# Altium PCB Battery Pack BP8.PcbDoc
Units mm, origin at the board's own origin, x right, y up, seen from the top; angles counter-clockwise.
Board outline 55 x 45 mm, 2 copper layers (Top Layer, Bottom Layer), stack 1.57 mm thick; 25 components, 12 nets, 64 pads, 10 vias.
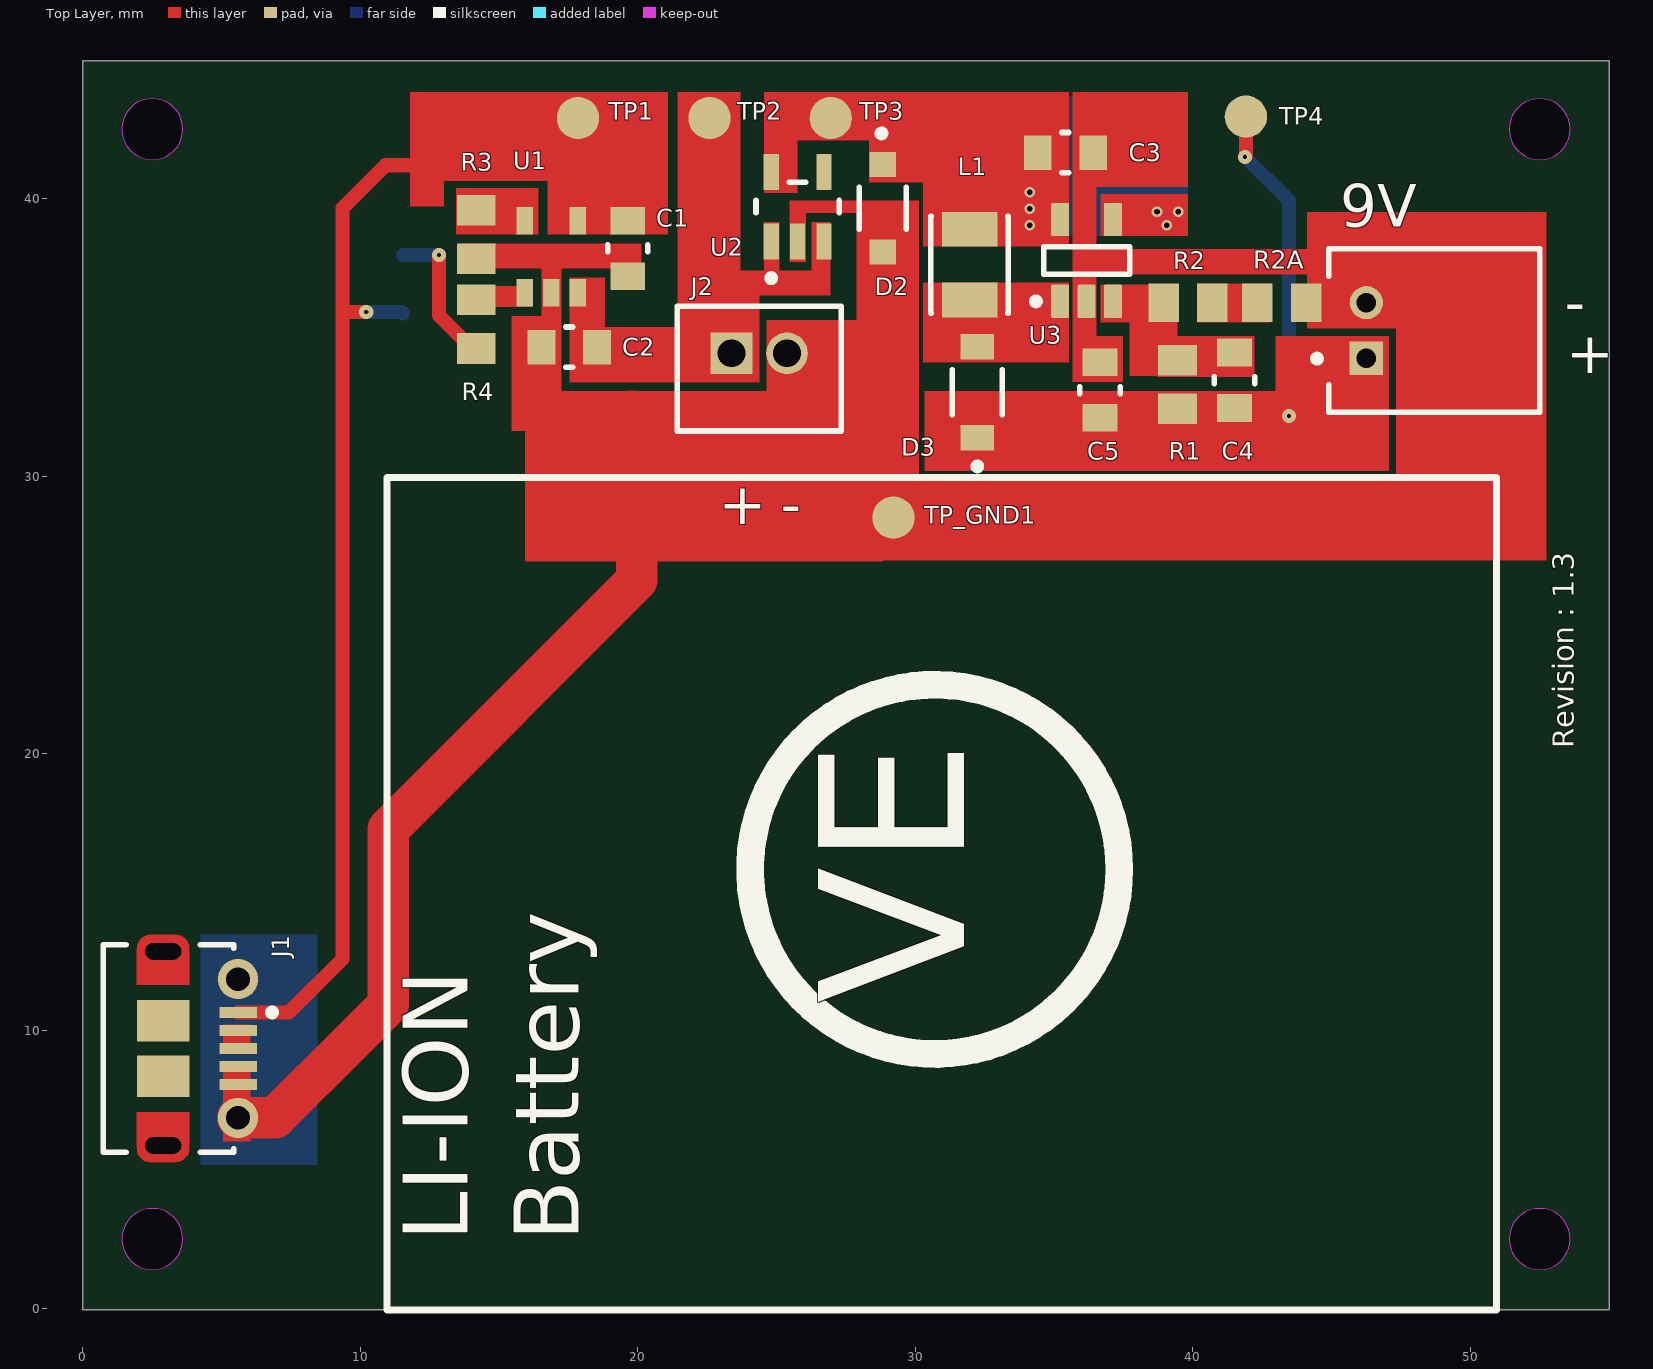
[diagram p0: Top Layer view]
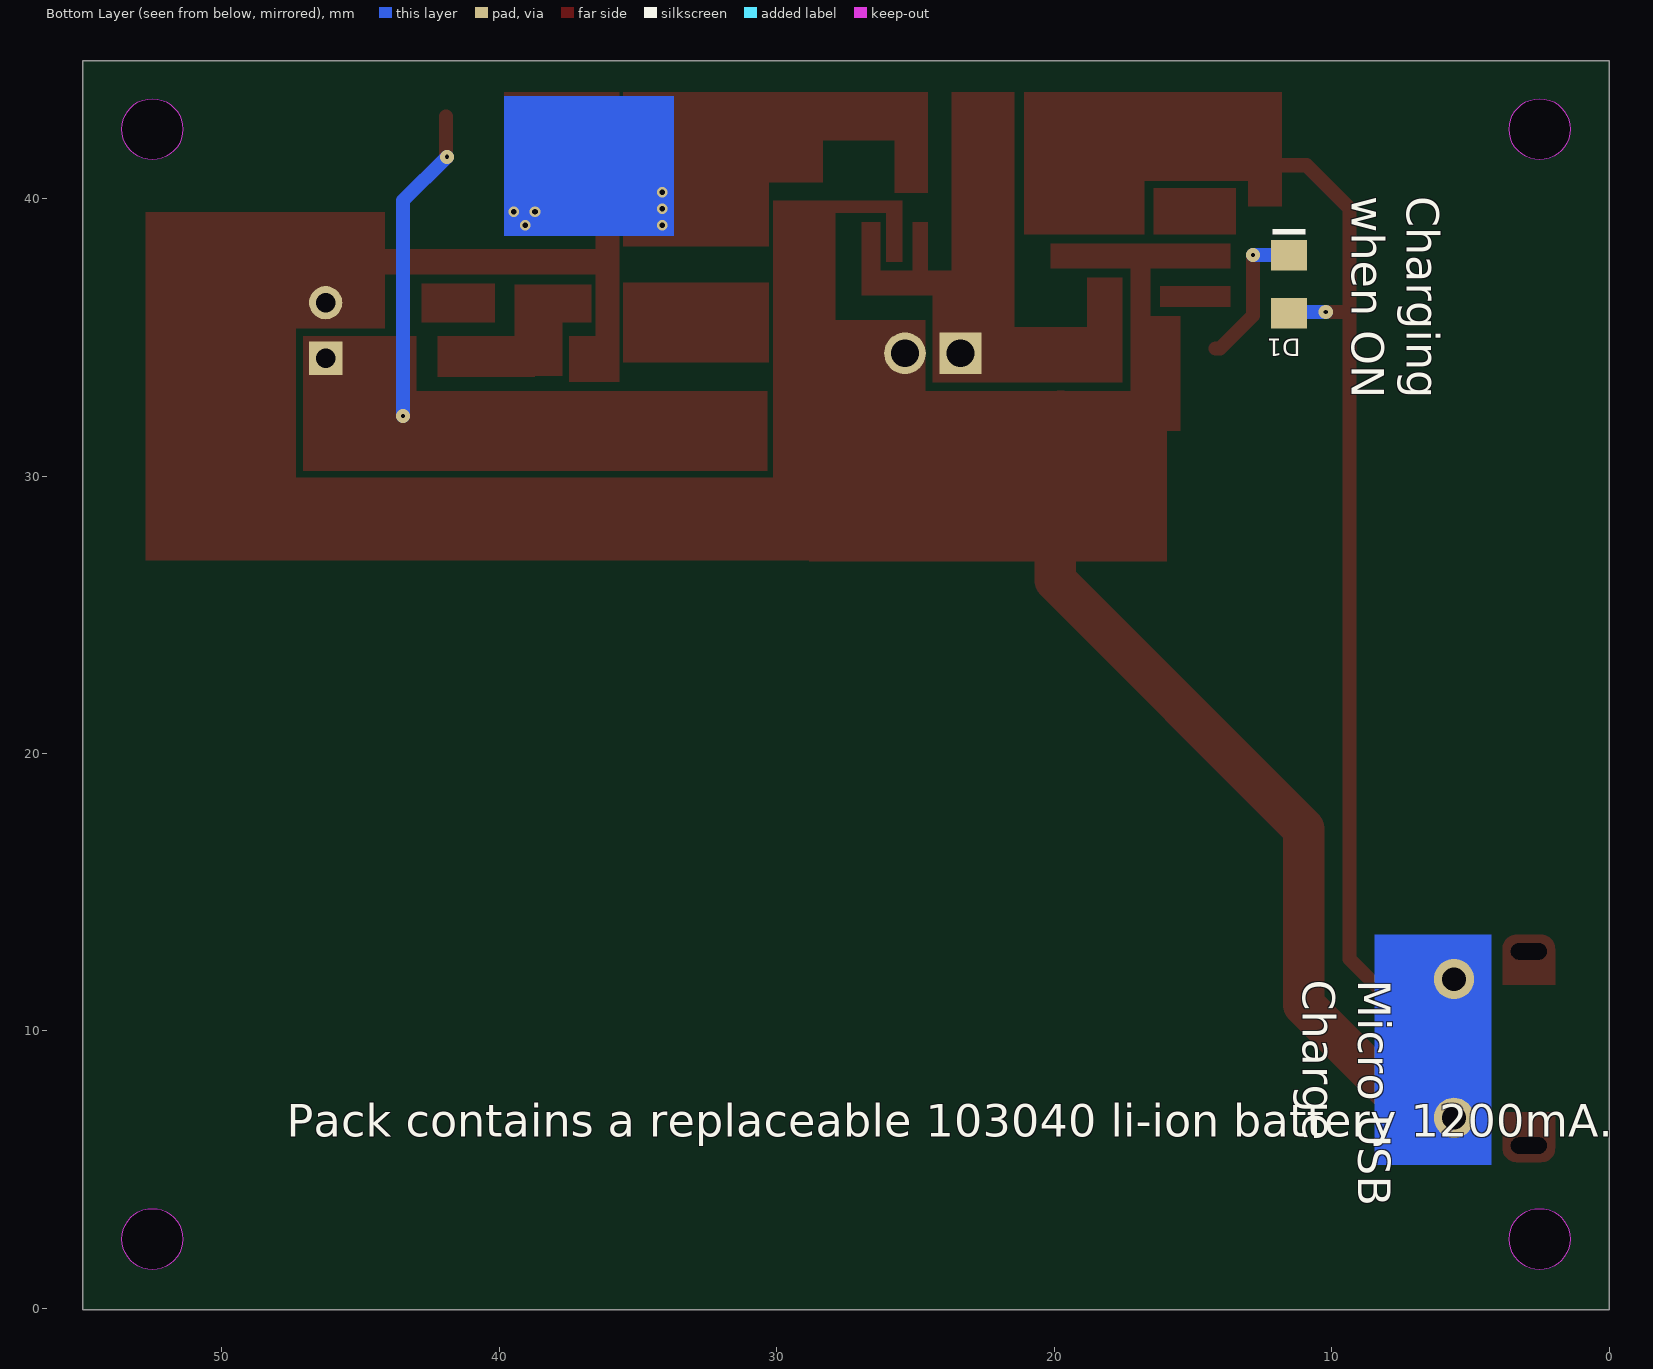
[diagram p1: Bottom Layer view, seen from below]
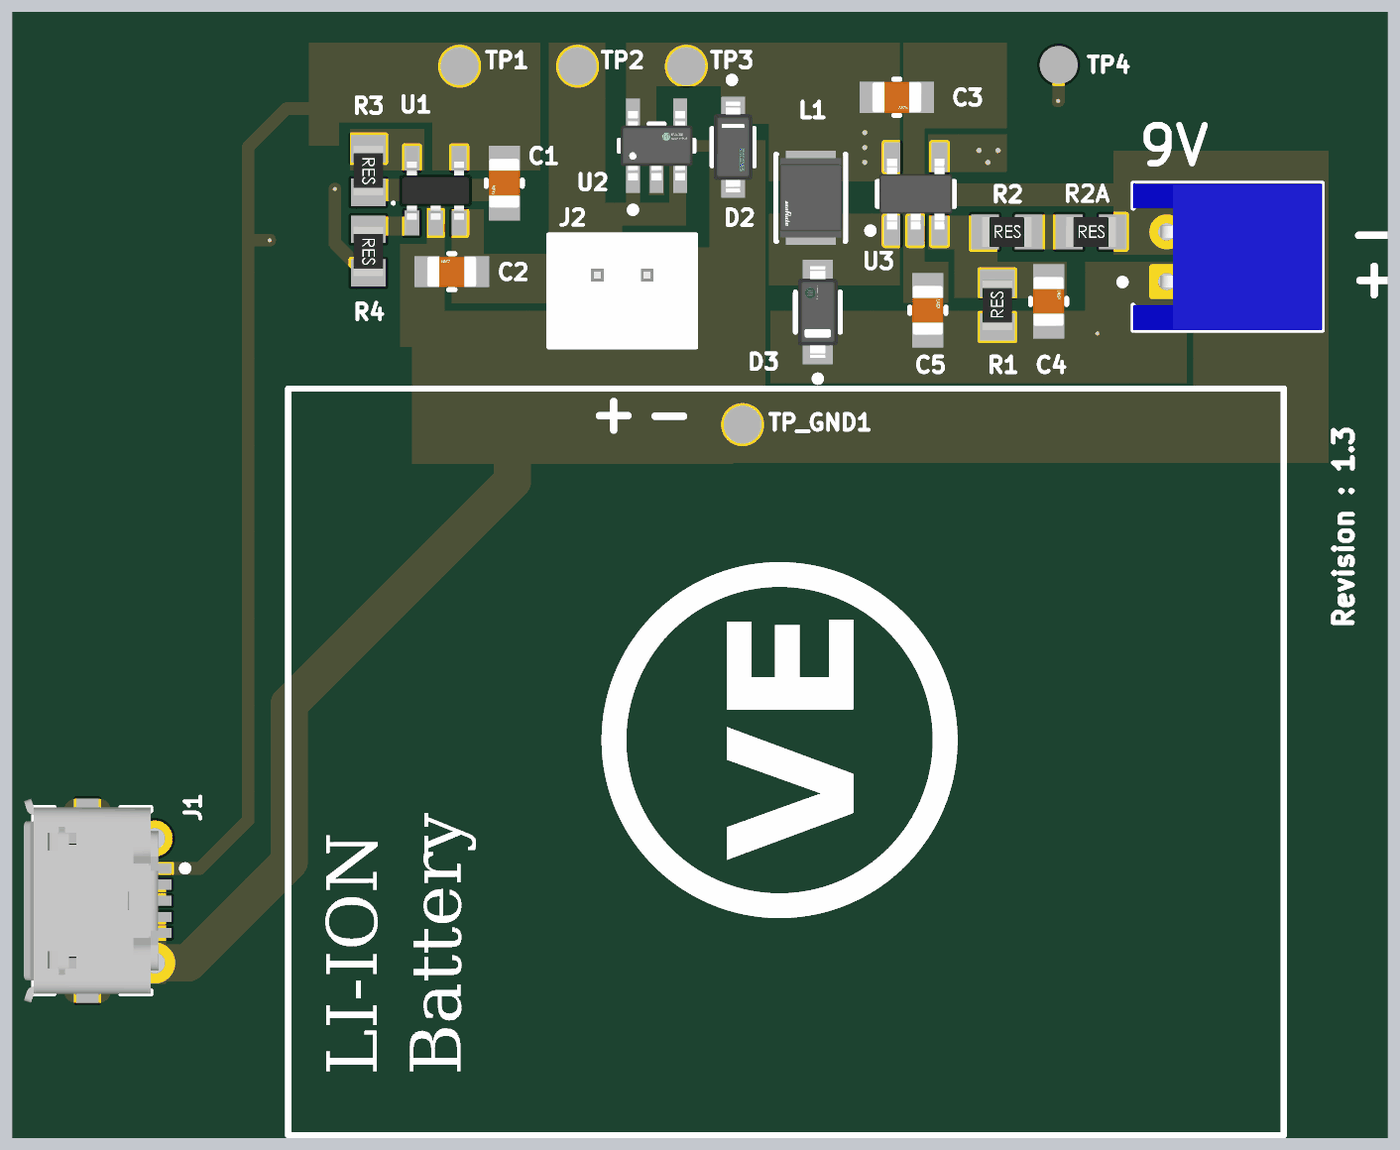
[diagram p2: 3D render of the assembled board from above, using the file's embedded part models]

## Layer stack, top to bottom
Top Solder: solder mask 0.0102, Solder Resist, Dk 3.5
Top Layer: signal copper 0.0356
Dielectric 1: core 1.4986, Core-043, Dk 4.3
Bottom Layer: signal copper 0.0356
Bottom Solder: solder mask 0.0102, Solder Resist, Dk 3.5

## Board outline
0,-0.042 0,44.958 55,44.958 55,-0.042
cut-out: 51.4,42.5 ccw(c52.5,42.5) 52.5,41.4 ccw(c52.5,42.5) 53.6,42.5 ccw(c52.5,42.5) 52.5,43.6 ccw(c52.5,42.5)
cut-out: 51.4,2.5 ccw(c52.5,2.5) 52.5,1.4 ccw(c52.5,2.5) 53.6,2.5 ccw(c52.5,2.5) 52.5,3.6 ccw(c52.5,2.5)
cut-out: 1.4,42.5 ccw(c2.5,42.5) 2.5,41.4 ccw(c2.5,42.5) 3.6,42.5 ccw(c2.5,42.5) 2.5,43.6 ccw(c2.5,42.5)
cut-out: 1.4,2.5 ccw(c2.5,2.5) 2.5,1.4 ccw(c2.5,2.5) 3.6,2.5 ccw(c2.5,2.5) 2.5,3.6 ccw(c2.5,2.5)

## Design rules (kind name [scope] priority, off if disabled: settings)
Clearance [All] p1: gap=0.076 ignorepadtopadclearanceinfootprint=FALSE
HoleSize [All] p1: absolutevalues=TRUE maxlimit=3 minlimit=0.025 maxpercent=80.000 minpercent=20.000
MinimumSolderMaskSliver [All] p1: minsoldermaskwidth=0.025
PolygonConnect [All] p1: connectstyle=Relief reliefconductorwidth=0.254 reliefentries=4 polygonreliefangle="90 Angle" airgapwidth=0.254
RoutingVias [All] p1: holewidth=0.152 width=0.508 viastyle="Through Hole" minholewidth=0.152 minwidth=0.508 maxholewidth=0.152 maxwidth=0.508
SilkToSilkClearance [All] p1: silktosilkclearance=0.025
SilkToSolderMaskClearance [IsPad] p1: minsilkscreentomaskgap=0.025 clearancetoexposedcopper=TRUE
SolderMaskExpansion [All] p1: expansion=0.102 istentingtop=FALSE
Width [All] p1: maxlimit=2.54 minlimit=0.381 preferedwidth=0.508 bottomlayer_maxwidth=0.508 minimp=50.000000 maximp=50.000000 favimp=50.000000
26 further rules are at their usual default settings.

## Components (designator, comment, footprint, x,y, rotation, side; value= is the part's Value field where it differs from the comment)
9V "S2B-PH-K-S(LF)(SN)" JST-S2B-PH-K-S_V 48.703,35.246 r90 top
C1 "GCM21BR71C475KA73K" FP-0805-L_2_01_0_2-W_1_25-MFG 19.634,38.202 r270 top value=4.7uF
C2 "GCM21BR71C475KA73K" FP-0805-L_2_01_0_2-W_1_25-MFG 17.526,34.646 r180 top value=4.7uF
C3 "GCM21BR71C475KA73K" FP-0805-L_2_01_0_2-W_1_25-MFG 35.408,41.655 r0 top value=4.7uF
C4 "C0805C229C2GACTU" FP-0805-L_2_01_0_2-W_1_25-MFG 41.504,33.451 r90 top value=2.2pF
C5 "GCM21BR71C475KA73K" FP-0805-L_2_01_0_2-W_1_25-MFG 36.652,33.096 r90 top value=4.7uF
D1 "150080RS75000" WL-SMCW_0805_150080xx75000 11.532,36.915 r270 bottom
D2 "BZT52C5V1-7-F" FP-SOD123-MFG 28.829,39.649 r270 top
D3 "MBR0530" FP-425-04-MFG 32.233,33.02 r90 top
J1 "105017-0001" USB-MICRO-B_V 4.238,9.368 r270 top
J2 "B2BPHKSLFSN" JST-B2B-PH-K-S_V 24.375,33.872 r0 top value=JST-PH-2
L1 "LQH32PN330MN0L" FP-LQH32PB_N0-MFG 31.953,37.617 r270 top
R1 "RES" RES0805 39.446,33.299 r90 top value=1M2
R2 "RES" RES0805 39.827,36.246 r0 top value=100K
R2A "RES" RES0805 43.205,36.246 r0 top value=91K
R3 "RES" RES0805 14.175,38.711 r270 top value=4K7
R4 "RES" RES0805 14.175,35.471 r270 top value=470R
TP1 "TESTPOINT" TP-TOP 17.841,42.901 r0 top
TP2 "TESTPOINT" TP-TOP 22.581,42.901 r90 top
TP3 "TESTPOINT" TP-TOP 26.949,42.901 r90 top
TP4 "TESTPOINT" TP-TOP 41.91,42.951 r90 top
TP_GND1 "TESTPOINT" TP-TOP 29.21,28.499 r90 top
U1 "MCP73831T-2ACI/OT" SOT23-5 16.876,36.602 r0 top
U2 "MAX40203AUK+" FP-U5-2-MFG 25.756,39.706 r90 top
U3 "TPS61041DBVR" DBV0005A_M 36.17,37.769 r90 top

## Footprints (in the part's own frame and the unit in brackets; to place one, negate y for a bottom-side part, rotate by r counter-clockwise, add the part's x,y. Pads: shape width x height; smd on the part's side, far side on the other; paste and mask are expansions set on the pad)
DBV0005A_M [mm] "SOT23, 5-Leads, Body 3.05x1.75mm, Pitch 0.95mm, IPC Low Density"
  rrect15% 1.2x0.65 smd: 1(-1.475,0.95) 2(-1.475,0) 3(-1.475,-0.95) 4(1.475,-0.95) 5(1.475,0.95)
  silkscreen extent -1.6,-1.55 0.5,1.95, body extent -1.42,-1.46 1.42,1.46, height 1.08
FP-425-04-MFG [mil]
  rect 36x48 smd paste+0 mask+0: 1(-64.5,0) 2(64.5,0)
  silkscreen extent -110,-35 32,35, body extent -86,-39 86,39, height 10
FP-0805-L_2_01_0_2-W_1_25-MFG [mm]
  rect 1x1.25 smd paste+0 mask+0: 1(-1,0) 2(1,0)
  silkscreen extent -0.12,-0.73 0.13,0.72, body extent -1.6,-0.82 1.6,0.82, height 0.25
FP-LQH32PB_N0-MFG [mm]
  rect 1.25x2 smd paste+0 mask+0: 1(-1.275,0) 2(1.275,0)
  silkscreen extent -1.75,-1.4 1.75,1.4, body extent -2,-1.5 2,1.5, height 0.25
FP-SOD123-MFG [mm]
  rect 0.9x0.95 smd paste+0 mask+0: 1(-1.575,0) 2(1.575,0)
  silkscreen extent -2.82,-0.85 0.75,0.85, body extent -2.12,-0.95 2.12,0.95, height 0.25
FP-U5-2-MFG [mm]
  rect 1.3x0.55 smd paste+0 mask+0: 1(-1.25,0.95) 2(-1.25,0) 3(-1.25,-0.95) 4(1.25,-0.95) 5(1.25,0.95)
  silkscreen extent -2.7,-1.5 0.87,1.5, body extent -2,-1.73 2,1.73, height 0.25
JST-B2B-PH-K-S_V [mm] "Connector, 2-Leads, Body 5.9x4.5mm, Pitch 2mm"
  rect 1.5x1.5 hole 1: 1(-1,0.55)
  round 1.5 hole 1: 2(1,0.55)
  silkscreen extent -2.95,-2.25 2.95,2.25, body extent -2.93,-2.34 2.93,2.33, height 5.89
JST-S2B-PH-K-S_V [mm] "THD, 2-Leads, Body 7.6x5.9mm, Pitch 2mm"
  rect 1.2x1.2 hole 0.7: 1(-1,2.45)
  round 1.2 hole 0.7: 2(1,2.45)
  silkscreen extent -2.95,-3.8 2.95,4.35, body extent -2.95,-3.8 2.95,3.8, height 4.8
RES0805 [mm]
  rect 1.1x1.4 smd: 1(0.875,0) 2(-0.875,0)
  body extent -1,-0.6 1,0.6, height 0.7
SOT23-5 [mm] "SOT143-4 as used in SP0503BAHTG"
  round 0.2 on Top Overlay: 1(-1.7,0.8)
  rect 0.6x1 smd: 1(-0.95,0) 2(0,0) 3(0.95,0) 4(0.95,2.6) 5(-0.95,2.6)
  body extent -1.46,0.13 1.46,2.47, height 1
TP-TOP [mil] "Top layer test point"
  round 60 smd: 0(0,0)
USB-MICRO-B_V [mm] "USB, MICRO B, Body 7.491x4.695 mm, Pitch 0.65 mm"
  rect 0.4x1.35 smd: 1(-1.3,1.35) 2(-0.65,1.35) 3(0,1.35) 4(0.65,1.35) 5(1.3,1.35)
  round 1.45 hole 0.85: 6(-2.5,1.35) 7(2.5,1.35)
  rrect50% 0x0 hole 0.6 slot 1.3 at 90 deg: 8(-3.5,-1.35) 11(3.5,-1.35)
  rect 1.5x1.9 smd: 9(-1,-1.35) 10(1,-1.35)
  Top Layer region: -3.6,-1.8 -3.6,-0.9 -4.1,-0.9 -4.1,-1.8
  Top Layer region: 3.6,-0.9 3.6,-1.8 4.1,-1.8 4.1,-0.9
  Top Layer region: 2.3,-0.4 2.3,-2.3 3.6,-2.3 3.6,-0.4
  Top Layer region: -2.3,-2.3 -2.3,-0.4 -3.6,-0.4 -3.6,-2.3
  Top Layer lines w0.5: -3.477,-1.582 ccw(c-3.6,-1.8) -3.477,-1.582 ; -3.477,-1.582 cw(c-3.6,-1.8) -3.473,-1.585 cw(c-3.6,-1.8) -3.461,-1.592 cw(c-3.6,-1.8) -3.442,-1.606 cw(c-3.6,-1.8) -3.392,-1.662 cw(c-3.6,-1.8) -3.382,-1.677 cw(c-3.6,-1.8) -3.377,-1.686 cw(c-3.6,-1.8) -3.366,-1.711 cw(c-3.6,-1.8) -3.35,-1.79 cw(c-3.6,-1.8) -3.85,-1.8 cw(c-3.6,-1.8) -3.477,-1.582 ; 3.35,-1.8 ccw(c3.6,-1.8) 3.35,-1.8 ; 3.6,-1.15 cw(c3.6,-0.9) 3.35,-0.903 cw(c3.6,-0.9) 3.35,-0.9 cw(c3.6,-0.9) 3.35,-0.899 cw(c3.6,-0.9) 3.355,-0.848 cw(c3.6,-0.9) 3.67,-0.66 cw(c3.6,-0.9) 3.85,-0.904 cw(c3.6,-0.9) 3.849,-0.926 cw(c3.6,-0.9) 3.835,-0.984 cw(c3.6,-0.9) 3.8,-1.05 cw(c3.6,-0.9) 3.776,-1.078 cw(c3.6,-0.9) 3.75,-1.1 cw(c3.6,-0.9) 3.67,-1.14 cw(c3.6,-0.9) 3.668,-1.141 cw(c3.6,-0.9) 3.664,-1.142 cw(c3.6,-0.9) 3.664,-1.142 cw(c3.6,-0.9) 3.6,-1.15 ; -3.5,-1.129 ccw(c-3.6,-0.9) -3.44,-1.092 ccw(c-3.6,-0.9) -3.433,-1.086 ccw(c-3.6,-0.9) -3.423,-1.077 ccw(c-3.6,-0.9) -3.414,-1.067 ccw(c-3.6,-0.9) -3.5,-0.671 ccw(c-3.6,-0.9) -3.792,-0.74 ccw(c-3.6,-0.9) -3.819,-0.78 ccw(c-3.6,-0.9) -3.829,-0.8 ccw(c-3.6,-0.9) -3.85,-0.9 ccw(c-3.6,-0.9) -3.5,-1.129
  silkscreen extent -3.75,-3.5 3.75,2.7, body extent -4.1,-3.9 4.1,1.5, height 2.67
WL-SMCW_0805_150080xx75000 [mm] "SMD Mono-color Chip LED, body 2.0x1.25mm"
  rect 1.1x1.3 smd: 1(-1.05,0) 2(1.05,0)
  silkscreen extent -2,-0.6 -1.8,0.6, body extent -1,-0.63 1,0.62, height 0.7

## Part data
9V: library part CMP-1755-00004-1, "Male Header, Pitch 2 mm, 1 x 2 Position, Height 4.8 mm, Tail Length 3.4 mm, -25 to 85 degC, RoHS, Bulk", Capacitance="10 uF", Case\Package=Radial, Max Operating Temperature="85 degC", Min Operating Temperature="-40 degC", Package Quantity=200, Tolerance=20%, Voltage Rating="50 V", ComponentLink1Description=Datasheet, ComponentLink1URL=http://www.jst-mfg.com/product/pdf/eng/ePH.pdf, DatasheetVersion=Dec-12, Diameter="5 mm", Height="11 mm", Lead Pitch="2 mm", Length="11 mm", Mount="Through Hole", PackageDescription="Male Header, Pitch 2 mm, 1 x 2 Position, Height 4.8 mm, Tail Length 3.4 mm", PackageReference=S2B-PH-K-S, Packaging=Bulk, Pins=2, Radiation Hardening=No, REACH SVHC="No SVHC", RoHSCompliant=true, Voltage Rating (DC)="50 V"
C1 C2 C3 C5: library part CMP-2007-04518-2, "General Purpose Ceramic Capacitor, 0805, 4.7uF, 10%, X7R, 15%, 16V", Capacitance=4.7uF, Case Code (Imperial)=0805, Case Code (Metric)=2012, Dielectric=X7R, Max Operating Temperature=125°C, Min Operating Temperature=-55°C, Package Quantity=1, Tolerance=10%, Voltage=10V, Voltage Rating=16V, Case/Package=0805, Construction=Flat, Contact Plating=Tin, Depth=1.25mm, Dissipation Factor=3.5%, Height=1.52mm, Lead Free="Lead Free", Length=2.01mm, Mount="Surface Mount", Number of Pins=2, Packaging="Tape and Reel", Radiation Hardening=No, REACH SVHC="No SVHC", RoHS Compliant=Yes, Series=-, Termination=SMD/SMT, Thickness=0.06inch, Voltage Rating (DC)=16V, Width=0.049inch
C4: library part CMP-2007-04518-2, "General Purpose Ceramic Capacitor, 0805, 4.7uF, 10%, X7R, 15%, 16V", Capacitance=2.2pF, Case Code (Imperial)=0805, Case Code (Metric)=2012, Dielectric=X7R, Max Operating Temperature=125°C, Min Operating Temperature=-55°C, Package Quantity=1, Tolerance=10%, Voltage=10V, Voltage Rating=16V, Case/Package=0805, Construction=Flat, Contact Plating=Tin, Depth=1.25mm, Dissipation Factor=3.5%, Height=1.52mm, Lead Free="Lead Free", Length=2.01mm, Mount="Surface Mount", Number of Pins=2, Packaging="Tape and Reel", Radiation Hardening=No, REACH SVHC="No SVHC", RoHS Compliant=Yes, Series=-, Termination=SMD/SMT, Thickness=0.06inch, Voltage Rating (DC)=16V, Width=0.049inch
D1: library part CMP-1426-00011-2, Case Code (Imperial)=0805, Case Code (Metric)=2012, Color=Red, Forward Current=100mA, Forward Voltage=2V, Max Operating Temperature=85°C, Max Reverse Voltage (DC)=5V, Min Operating Temperature=-40°C, Test Current=20mA, Case/Package=0805, Dominant Wavelength=625nm, Height=700µm, Length=2mm, Lens Style="Clear, Rectangular", Luminous Intensity=150mcd, Mount="Surface Mount", NexarPartId=29717781, Packaging="Tape and Reel", Peak Wavelength=630nm, REACH SVHC=Unknown, RoHS=Compliant, Viewing Angle=140°, Wavelength=625nm, Width=1.25mm
D2: library part CMP-2000-05976-2, "DIODE ZENER 5.1V 500MW SOD123", Forward Current=10mA, Manufacturer="Diodes Incorporated", Max Junction Temp=+150°C, Max Reverse Leakage Current=2uA, Max Zener Voltage=5.4V, Nom Zener Voltage=5.1V, Package=SOD123, Power Dissipation=370mW, Temperature="-65°C to +150°C", Temperature Range Low=-65°C, Automotive=No, Automotive Grade=NA, Category=Diode, ComponentLink2Description=Datasheet, ComponentLink2URL=https://www.diodes.com/assets/Datasheets/ds18004.pdf, Device Class L1="Discrete Semiconductors", Device Class L2=Diodes, Device Class L3="Zener Diodes", Digikey Description="DIODE ZENER 5.1V 500MW SOD123", Footprint Url=https://www.diodes.com/assets/Package-Files/SOD123.pdf, Height=1.45mm, Lead Free=Yes, Manufacturer Part Number=BZT52C5V1-7-F, Mouser Description="Zener Diodes 5.1V 500mW", Octopart=https://octopart.com/bzt52c5v1-7-f-diodes+inc.-326718, RoHS=TRUE, Standoff Height=0mm, Temperature Range High=+150°C, Zener Impedance=60Ω
D3: library part CMP-2000-05113-2, "DIODE SCHOTTKY 30V 500MA SOD123", Average Rectified Current=500mA, Forward Voltage=430mV, Max Forward Surge Current (Ifsm)=5.5A, Max Operating Temperature=150°C, Max Repetitive Reverse Voltage (Vrrm)=30V, Max Reverse Leakage Current=130uA, Min Operating Temperature=-65°C, Package Quantity=1, Contact Plating=Tin, Current Rating=500mA, Element Configuration=Single, Forward Current=500mA, Height=1.03mm, Lead Free="Lead Free", Length=2.7mm, Max Reverse Voltage (DC)=30V, Max Surge Current=5.5A, Mount="Surface Mount", Number of Pins=2, Output Current=500mA, Packaging="Tape and Reel", Peak Non-Repetitive Surge Current=5.5A, Peak Reverse Current=130uA, Polarity=Standard, Radiation Hardening=No, REACH SVHC="No SVHC", Voltage Rating (DC)=30V, Weight=0.03g, Width=1.6mm
J1: library part CMP-2000-05827-1, "Micro-USB B Receptacle, Right Angle, Bottom Mount, Surface Mount, with Solder Tabs, -30 to 85 degC, 5-Pin USB, RoHS, Tape and Reel", Manufacturer=Molex, Package Description="5-Leads USB, Micro B, Body 7.5 x 5 mm, Pitch 0.65 mm", Package Reference=MICRO-B, Package Version="Rev. F, 12/2012", Standard Package=1, Voltage - Max=30V, 3D Model=105017-0001.stp, Catalog Drawings=1050170001, Category=Connectors,Interconnects, Circuits=5, Connector Type=USB-microB, Datasheet URL=http://www.molex.com/elqNow/elqRedir.htm?ref=http://www.molex.com/webdocs/datasheets/pdf/en-us/1050170001_IO_CONNECTORS.pdf, Datasheet Version=03/2016, Family=USB,DVI,HDMIConnectors, Featured Product=Micro-USBConnectorsUSBConnectors, Features=Shielded,SolderRetention, Gender=Receptacle, Ingress Protection=-, Manufacturer URL=http://www.molex.com/, Mating Products=WM17145-ND-CABLEMICROUSBBTOSTDA1.0MWM17147-ND-CABLEMICROUSBBTOSTDA2.0MWM17146-ND-CABLEMICROUSBBTOSTDA1.5M, Mounting Technology=SurfaceMount, Mounting Type=BoardCutout,SurfaceMount,RightAngle, Number of Contacts=5, Online Catalog=Molex-MicroUSB, Other Names=WM1399DKR, Package URL=http://www.molex.com/pdm_docs/sd/1050170001_sd.pdf, Packaging=Digi-Reel®, PCN Assembly/Origin=ResinSupplier21/Oct/2015, RoHS Information=1050170001CertofCompliance, Series=-, Specifications=-
J2: library part CMP-002-00127-1, "Connector Header, PH Series, 2 Position, 2.00mm, Through Hole, Press-Fit, Solder, Natural"
L1: library part CMP-06042-000935-1, "Wire Wound Ferrite Inductor for Power Lines 33μH ±20% 1.38Ω 390mA 1210", Case Code (Imperial)=1210, Case Code (Metric)=3225, Current Rating=390mA, DC Resistance (DCR)=1.38R, Inductance=33uH, Max DC Current=380mA, Max Operating Temperature=85°C, Min Operating Temperature=-40°C, Package Quantity=2000, Resistor Type=Wirewound, Self Resonant Frequency=13MHz, Test Frequency=1MHz, Tolerance=20%, Case/Package=1210, Core Material=Ferrite, Depth=2.5mm, Height=2mm, Height - Seated (Max)=0.086inch, Length=3.2mm, Mount="Surface Mount", Packaging="Tape and Reel", Saturation Current=380mA, Shielding=Shielded, Termination=SMD/SMT, Weight=0.001552oz, Width=0.098inch
R1 R3 R4: library part RES-SM-0805-NC, "RES SM 0805 NC", Manufacturer=GENERIC, Package=0805, Part Number=RES-SM-0805-NC
R2: library part RES-SM-0805-NC, "RES SM 0805 NC", Manufacturer=Vishay, Package=0805, Part Number=CRCW0805100KFKEA
R2A: library part RES-SM-0805-NC, "RES SM 0805 NC", Manufacturer=GENERIC, Package=0805, Part Number=CRCW080591K0FKEA
TP1 TP2 TP3 TP4 TP_GND1: library part CMP-029-000000-1, Part Number=TESTPOINT
U1: library part CMP-031-00106-1, "Power Supply Support Circuit, Adjustable, 1 Channel, PDSO5", Case/Package=LSSOP, Max Operating Temperature=85°C, Max Supply Voltage=6V, Min Operating Temperature=-40°C, Min Supply Voltage=3.75V, Pins=5, RoHS Compliant=Yes
U2: library part CMP-05723-000008-1, "IC IDEAL DIODE", Manufacturer="Maxim Integrated", Max Junction Temp=+150°C, Max Power Dissipation=312.6mW, Max Supply Voltage=5.5V, Min Supply Voltage=1.2V, Nominal Supply Current=0.13-0.3uA, Output Current=2A, Package=U5-2, Temperature="-40°C to +125°C", Temperature Range High=+125°C, Temperature Range Low=-40°C, Automotive=No, Category=IC, ComponentLink2Description=Datasheet, ComponentLink2URL=https://datasheets.maximintegrated.com/en/ds/MAX40203.pdf, Device Class L1="Integrated Circuits (ICs)", Device Class L2="Power Management ICs", Device Class L3="Voltage Supervisors", Digikey Description="IC IDEAL DIODE", Footprint Url=https://pdfserv.maximintegrated.com/land_patterns/90-0174.PDF, Height=1.45mm, Ipc Land Pattern Name=SOT95P280X125-5, Lead Free=Yes, Manufacturer Part Number=MAX40203AUK+, Number Of Outputs=1, Number Of Rails Monitored=1, Octopart=https://octopart.com/max40203auk%2B-maxim+integrated-97007183, RoHS=TRUE, Standoff Height=0mm
U3: library part CMP-0388-00116-2, "28 V, 250 mA Switch Boost Converter for LCD and White LED Applications, 1.8 to 6 V, -40 to 85 degC, 5-pin SOT23 (DBV5), Green (RoHS & no Sb/Br)", Manufacturer="Texas Instruments", Rating=Catalog, Switching Frequency(Max)(kHz)=1000, Code_JEDEC=MO-178, ComponentLink1Description="Manufacturer URL", ComponentLink1URL=http://www.ti.com/, ComponentLink2Description=Datasheet, ComponentLink2URL=http://www.ti.com/general/docs/lit/getliterature.tsp?genericPartNumber=TPS61041&fileType=pdf, ComponentLink3Description="Package Specification", ComponentLink3URL=http://www.ti.com/litv/pdf/mpds018i, DatasheetVersion=SLVS413F, Dimming=TRUE, Eco-Plan="Green (RoHS & no Sb/Br)", Iout(Max)(A)=0.05, Iq(Typ)(mA)=0.028, Mounting Technology="Surface Mount", PackageDescription="5-Pin Plastic Small Outline, Body 1.60 Ãƒâ€” 2.90 mm, Pitch 0.95 mm", PackageReference=DBV0005A, PackageVersion=4073253-4/K, PartNumber=TPS61041DBVR, SubFamily="White LED Driver", Topology=Boost, Vin(Max)(V)=6, Vin(Min)(V)=1.8

## Via types
v1: diameter 0.381, hole 0.203, Top Layer to Bottom Layer, tented both sides, 6 vias
v2: diameter 0.508, hole 0.152, Top Layer to Bottom Layer, tented both sides, 4 vias

## Nets (pads, with @x,y where several pads share a name; then routed paths per layer and width w, separated by ;. In a path a pad name is that pad's centre, name@x,y a point inside that pad or via, vN(x,y) a via of type N, cw(c..) or ccw(c..) an arc to the next point about the centre after c; other vN are vias at no path point)
GND: 9V.2 C1.2 C2.2 C3.2 C5.2 D2.2 J1.4 J1.5 J1.6 J1.7 J2.2 R2A.1 R3.1 TP_GND1.0 U1.2 U2.2 U3.2 | length 32
  Top Layer w1.5: J1.7 6.919,6.868 9.646,9.595 10.998,10.947 10.998,17.278 19.964,26.244 19.964,30.709
  Top Layer w2: 19.761,32.08 19.761,30.912 19.964,30.709
Net9V_1: 9V.1 C4.1 C5.1 D3.1 R1.2 TP4.0 | length 11.5
  Top Layer w0.508: v2(41.885,41.504) 41.91,41.529 TP4.0
  Bottom Layer w0.508: v2(41.885,41.504) 43.464,39.925 v2(43.464,32.165)
NetC1_1: C1.1 D1.2 J1.1 TP1.0 U1.4 | length 37.6
  Top Layer w0.508: J1.1 7.417,10.668 9.347,12.598 9.347,35.916 9.347,39.649 10.897,41.199 12.116,41.199 12.37,41.453 ; 9.348,35.915 v2(10.211,35.915)
  Bottom Layer w0.508: v2(10.211,35.915) 11.482,35.915 D1.2
NetC2_1: C2.1 J2.1 TP2.0 U1.3 U2.1 U2.3
NetC3_1: C3.1 D2.1 L1.1 TP3.0 U2.5 U3.4 U3.5
  other v1: 34.12,39.039 39.065,39.039 38.71,39.522 39.472,39.522 34.12,39.636 34.12,40.233
NetC4_2: C4.2 R1.1 R2.2 U3.3
NetD1_1: D1.1 R4.1 | length 5.3
  Top Layer w0.508: v2(12.83,37.965) 12.83,35.791 14.025,34.596 R4.1
  Bottom Layer w0.508: D1.1 v2(12.83,37.965)
NetD3_2: D3.2 L1.2 U3.1
NetJ1_2: J1.2 J1.3
NetR2_1: R2.1 R2A.2
NetR3_2: R3.2 U1.5
NetR4_2: R4.2 U1.1@15.926,36.602
pads on no net: J1.8 J1.9 J1.10 J1.11 U1.1@15.176,37.402 U2.4

## Other copper
Top Layer:
  rectangle net NetR4_2: 13.64,36.093 16.18,36.855
  rectangle net NetR3_2: 13.437,38.711 16.421,40.386
  rectangle net GND: 13.64,37.477 17.401,38.377
  region net NetD3_2: 35.535,34.096 35.535,36.982 30.277,36.982 30.277,34.096
  rectangle net NetC4_2: 37.72,33.596 39.446,36.894
  rectangle net NetC4_2: 38.71,33.576 42.229,35.051
  rectangle net NetC4_2: 36.67,35.535 39.446,36.894
  rectangle net NetR2_1: 40.157,35.535 42.799,36.932
  rectangle net GND: 35.827,37.269 44.582,38.19
  rectangle net GND: 24.638,26.924 28.829,35.617
  rectangle net GND: 36.17,33.392 37.477,35.051
  rectangle net NetC2_1: 21.425,37.287 23.698,43.84
  region net GND: 39.827,40.411 39.827,43.84 35.67,43.84 35.67,40.411
  rectangle net Net9V_1: 42.977,31.877 47.066,35.051
  rectangle net GND: 16.526,35.471 17.247,38.377
  rectangle net GND: 15.443,31.622 17.247,35.763
  rectangle net NetC1_1: 16.739,38.702 21.082,43.84
  rectangle net NetC1_1: 11.786,39.706 13.005,43.028
  rectangle net NetC3_1: 24.536,42.088 28.779,43.84
  rectangle net NetC3_1: 28.329,40.581 30.988,43.84
  rectangle net NetC3_1: 24.536,40.206 25.756,42.349
  rectangle net GND: 25.456,39.471 30.124,39.931
  rectangle net GND: 25.456,37.706 26.056,39.931
  rectangle net NetC2_1: 24.536,36.5 25.095,39.149
  rectangle net NetC2_1: 24.536,36.5 26.949,37.414
  rectangle net NetC2_1: 26.256,36.5 26.949,39.149
  rectangle net GND: 44.12,35.315 49.149,39.515
  rectangle net GND: 47.066,35.315 50.267,38.277
  rectangle net NetC2_1: 21.819,36.5 25.095,37.414
  rectangle net NetC2_1: 17.526,33.372 18.809,37.16
  rectangle net NetC2_1: 21.425,33.372 24.375,37.414
  rectangle net NetC2_1: 18.041,33.372 24.375,35.371
  rectangle net GND: 16.526,37.477 20.134,38.377
  region net NetC3_1: 39.827,38.644 39.827,40.157 36.67,40.157 36.67,38.644
  region net NetC3_1: 35.533,38.277 35.533,43.84 30.277,43.84 30.277,38.277
  region net GND: 36.525,33.392 36.525,41.986 35.67,41.986 35.67,33.392
  region net Net9V_1: 47.066,30.175 47.066,33.071 30.328,33.071 30.328,30.175
  rectangle net NetC1_1: 11.786,40.64 17.17,43.84
  rectangle net GND: 5.055,6.018 6.045,8.868
  rectangle net NetJ1_2: 5.055,9.195 6.045,10.236
  rectangle net GND: 15.926,26.924 25.375,33.071
  rectangle net GND: 47.32,26.949 52.756,39.515
  rectangle net GND: 27.879,26.949 52.756,29.947
  rectangle net GND: 27.879,26.949 30.124,39.931
Bottom Layer:
  region net NetC3_1: 39.827,38.644 39.827,43.687 33.706,43.687 33.706,38.644
  region net NetC3_1: 39.827,40.411 39.827,43.687 33.706,43.687 33.706,40.411
  rectangle net GND: 4.238,5.168 8.458,13.468

## Silkscreen, mask and mechanical layers (free items; w line width, h text height)
Top Overlay:
  circle w1: c30.695,15.823 r6.654
  lines w0.254: 10.952,-0.053 50.952,-0.053 50.952,29.947 10.952,29.947 10.952,-0.053
  text "-" at 53.411,35.517 h1.5
  text "+" at 53.462,33.705 h1.5
  text "+" at 22.906,28.269 h1.5
  text "-" at 25.141,28.252 h1.5
  text "Revision : 1.3" at 53.721,20.193 h0.76 r90
  text "VE" at 33.68,10.973 h10 r90
  text "LI-ION / Battery" at 18.644,2.413 h4 r90
Bottom Overlay:
  text "Charging / when ON" at 9.677,40.081 h2 r90
  text "Battery Pack BP-7/BP-8/BP-9 replacement for vintage Texas Instruments Calculators" at 52.261,14.173 h5
  text "Micro USB / Charge" at 11.435,11.847 h2 r90
  text "Pack contains a replaceable 103040 li-ion battery 1200mA.  / When charging LED lights up. Turns off when fully charged. This might take a couple of hours." at 47.65,3.785 h2
Board Shape:
  circle w0.254: c2.5,2.5 r1.1
  circle w0.254: c2.5,42.5 r1.1
  circle w0.254: c52.5,2.5 r1.1
  circle w0.254: c52.5,42.5 r1.1
  lines w0.254: 0,-0.042 55,-0.042 55,44.958 0,44.958 0,-0.042

## Dimensions
50.952,29.947 to 55,44.958 on dimensions
52.503,32.296 to 52.503,38.196 on dimensions
52.603,38.296 to 55,44.958 on dimensions
52.5,1.4 to 55,-0.042 on dimensions
0,-0.042 to 2.5,1.4 on dimensions
0.338,5.268 to 0,-0.042 on dimensions
55,44.958 to 0,44.958 on dimensions
0,44.958 to 0,-0.042 on dimensions

## Text inside footprints (layer, text, board x,y; h text height)
J1: Mechanical 1 "PCB EDGE" at 1.338,16.568 h0.3 r270